# EAGLE board 6PortCentral (EAGLE 7.7.0)
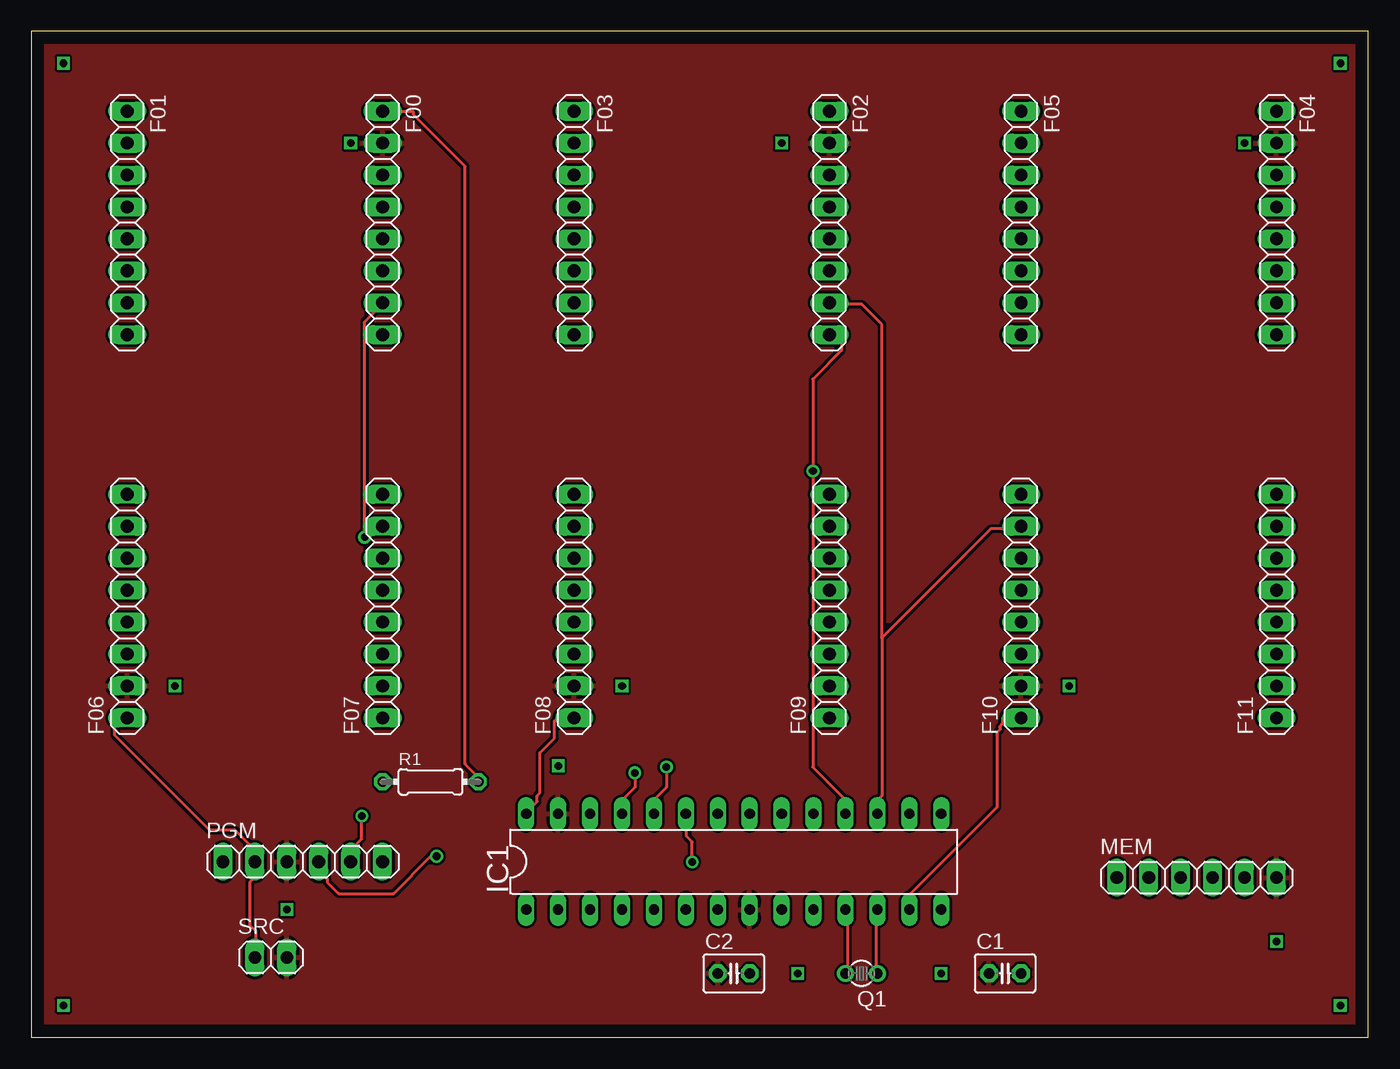
[diagram p0: board, top side]
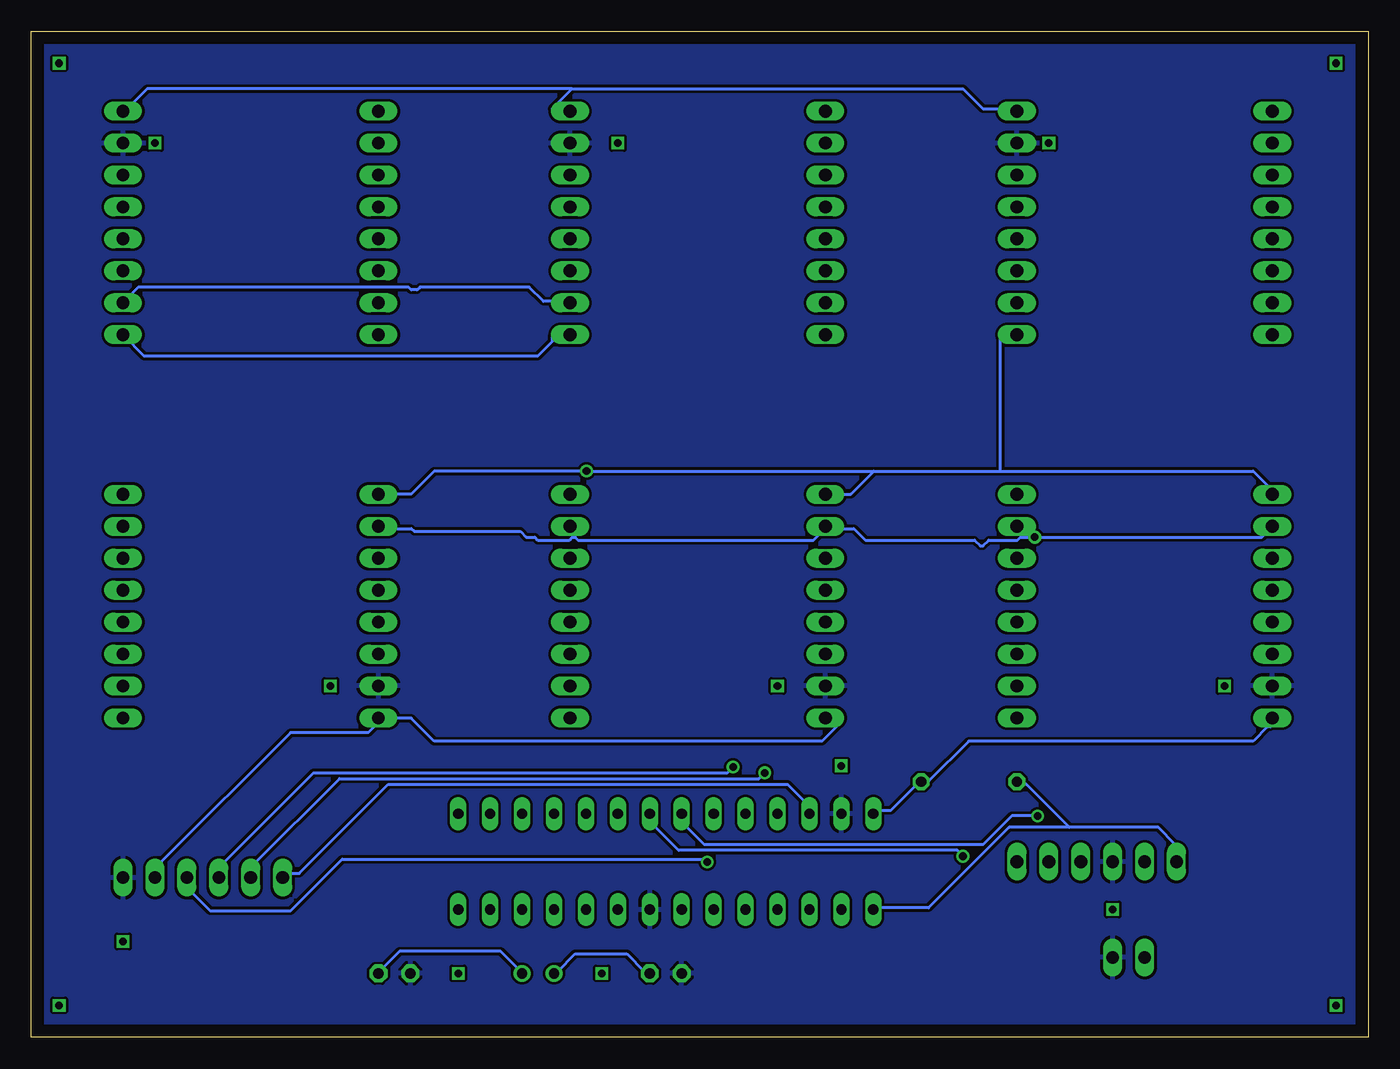
[diagram p1: board, bottom side, seen from below]

Size 106.35 x 80 mm. Coordinates in mm from the lower left corner, seen from the top.
Outline: 0,0 106.35,0 106.35,80 0,80 0,0
Copper layers (1*16): Top 0.035mm / dielectric 1.5mm / Bottom 0.035mm
Design rules "default": minimum track width 10mil, minimum drill 24mil, track to track 8mil, track to pad 8mil, pad to pad 8mil, via to via 8mil, smd to smd 8mil, copper to edge 40mil, drill to drill 8mil, minimum pad ring 10mil, minimum via ring 8mil, stop-mask expansion 4mil, vias tented up to drill 0mil, thermal gap 10mil

## Footprints (pad centres in the part's own frame; a part is rotated, then mirrored left to right if it is on the bottom)
C025-030X050 = drill 0.813 pad 1.422 octagon: 1 -1.27,0; 2 1.27,0
1X08 = drill 1.016 long: 1 -8.89,0; 2 -6.35,0; 3 -3.81,0; 4 -1.27,0; 5 1.27,0; 6 3.81,0; 7 6.35,0; 8 8.89,0
DIL28-3 = drill 0.813 long: 1 -16.51,-3.81; 2 -13.97,-3.81; 3 -11.43,-3.81; 4 -8.89,-3.81; 5 -6.35,-3.81; 6 -3.81,-3.81; 7 -1.27,-3.81; 8 1.27,-3.81; 9 3.81,-3.81; 10 6.35,-3.81; 11 8.89,-3.81; 12 11.43,-3.81; 13 13.97,-3.81; 14 16.51,-3.81; 15 16.51,3.81; 16 13.97,3.81; 17 11.43,3.81; 18 8.89,3.81; 19 6.35,3.81; 20 3.81,3.81; 21 1.27,3.81; 22 -1.27,3.81; 23 -3.81,3.81; 24 -6.35,3.81; 25 -8.89,3.81; 26 -11.43,3.81; 27 -13.97,3.81; 28 -16.51,3.81
1X06 = drill 1.016 long: 1 -6.35,0; 2 -3.81,0; 3 -1.27,0; 4 1.27,0; 5 3.81,0; 6 6.35,0
TC26V = drill 0.813: 1 -1.27,0; 2 1.27,0
0204/7 = drill 0.813 octagon: 1 -3.81,0; 2 3.81,0
1X02 = drill 1.016 long: 1 -1.27,0; 2 1.27,0

## Placement (x,y rotation side)
C1  [C025-030X050]  77.47,5.08 0 top
C2  [C025-030X050]  55.88,5.08 0 top
F00  [1X08]  27.94,64.77 270 top
F01  [1X08]  7.62,64.77 270 top
F02  [1X08]  63.5,64.77 270 top
F03  [1X08]  43.18,64.77 270 top
F04  [1X08]  99.06,64.77 270 top
F05  [1X08]  78.74,64.77 270 top
F06  [1X08]  7.62,34.29 90 top
F07  [1X08]  27.94,34.29 90 top
F08  [1X08]  43.18,34.29 90 top
F09  [1X08]  63.5,34.29 90 top
F10  [1X08]  78.74,34.29 90 top
F11  [1X08]  99.06,34.29 90 top
IC1  PIC24FJ64GA002  [DIL28-3]  55.88,13.97 0 top
MEM  [1X06]  92.71,12.7 0 top
PGM  [1X06]  21.59,13.97 0 top
Q1  [TC26V]  66.04,5.08 180 top
R1  10k  [0204/7]  31.75,20.32 0 top
SRC  [1X02]  19.05,6.35 0 top

## Library data of the parts
C1 C2 = adafruit
F00 F01-F09 F10 F11 MEM PGM SRC = pinhead
IC1 = microchip; MPN: PIC24FJ64GA002-I/SP; OC_FARNELL: 1332298; OC_NEWARK: 88K6132
Q1 = crystal; OC_FARNELL: unknown; OC_NEWARK: unknown
R1 = resistor

## Nets
GND: C1.1 C2.1 F00.2 F02.2 F04.2 F06.2 F08.2 F10.2 IC1.8 IC1.27 MEM.6 PGM.3 SRC.2
MISO: IC1.23 MEM.4
MOSI: IC1.24 MEM.3
N$1: IC1.1 PGM.1 R1.1
N$2: C1.2 IC1.12 Q1.1
N$3: C2.2 IC1.11 Q1.2
N$4: IC1.21 PGM.4
N$5: IC1.22 PGM.5
SCL: F00.7 F02.7 F04.7 F06.7 F08.7 F10.7 IC1.17
SDA: F00.8 F02.8 F04.8 F06.8 F08.8 F10.8 IC1.18
SPICK: IC1.25 MEM.2
SS: IC1.26 MEM.1
VDD: F00.1 F02.1 F04.1 F06.1 F08.1 F10.1 IC1.13 IC1.28 MEM.5 PGM.2 R1.2 SRC.1
VDDCORE: IC1.20

## Tracks (layer width: path | path; a pad name or v marks a point on that pad's centre or on a via)
GND
  pour Bottom: -1.27,81.28 107.95,81.28 107.95,-1.27 -1.27,-1.27
  pour Top: -1.27,81.28 107.95,81.28 107.95,-1.27 -1.27,-1.27
MISO  (via drill 0.61)
  Top 0.254: v52.58,13.95 52.58,15.54 52.12,16 52.12,17.6 IC1.23
  Bottom 0.254: v52.58,13.95 52.81,14.17 81.61,14.17 85.72,10.06 92.13,10.06 93.95,11.89 93.95,12.57 MEM.4
MOSI  (via drill 0.61)
  Top 0.254: v50.52,21.49 50.52,19.89 49.61,18.97 49.61,17.83 IC1.24
  Bottom 0.254: v50.52,21.49 50.98,21.03 83.9,21.03 91.44,13.49 MEM.3
N$1
  Bottom 0.254: 23.77,16.69 27.2,20.12 27.89,20.12 R1.1 | 23.77,16.69 16.69,16.69 15.32,15.32 15.32,14.17 PGM.1 | 23.77,16.69 28.57,16.69 34.98,10.29 39.32,10.29 IC1.1
N$2
  Top 0.254: Q1.1 67.21,5.26 67.21,10.06 IC1.12
  Bottom 0.254: C1.2 78.64,5.26 77.04,6.86 69.04,6.86 67.67,5.49 67.67,5.26 67.44,5.26 Q1.1
N$3
  Top 0.254: Q1.2 64.92,5.26 64.92,10.06 IC1.11
  Bottom 0.254: C2.2 57.15,5.26 57.61,5.26 58.98,6.63 63.09,6.63 64.47,5.26 64.69,5.26 Q1.2
N$4  (via drill 0.61)
  Top 0.254: v32.23,14.4 31.77,14.4 28.8,11.43 24.46,11.43 23.55,12.34 23.55,12.57 22.86,13.26 PGM.4
  Bottom 0.254: v32.23,14.4 32.69,14.86 54.86,14.86 56.69,16.69 56.69,17.14 57.15,17.6 IC1.21
N$5  (via drill 0.61)
  Top 0.254: v26.29,17.6 26.29,15.77 25.6,15.09 25.6,14.17 PGM.5
  Bottom 0.254: v26.29,17.6 28.35,17.6 30.63,15.32 52.81,15.32 54.18,16.69 54.41,16.69 54.41,17.6 IC1.22
N$6  (via drill 0.6)
  other vias: 2.54,77.47
N$7  (via drill 0.6)
  other vias: 104.14,77.47
N$8  (via drill 0.6)
  other vias: 104.14,2.54
N$9  (via drill 0.6)
  other vias: 2.54,2.54
N$10  (via drill 0.6)
  other vias: 20.32,10.16
N$11  (via drill 0.6)
  other vias: 11.43,27.94
N$12  (via drill 0.6)
  other vias: 46.99,27.94
N$13  (via drill 0.6)
  other vias: 82.55,27.94
N$14  (via drill 0.6)
  other vias: 99.06,7.62
N$15  (via drill 0.6)
  other vias: 72.39,5.08
N$16  (via drill 0.6)
  other vias: 60.96,5.08
N$17  (via drill 0.6)
  other vias: 41.91,21.59
N$18  (via drill 0.6)
  other vias: 25.4,71.12
N$19  (via drill 0.6)
  other vias: 59.69,71.12
N$20  (via drill 0.6)
  other vias: 96.52,71.12
SCL  (via drill 0.61)
  Top 0.254: v26.52,39.78 26.52,56.92 27.89,58.29 29.03,58.29 F00.7 | 67.67,31.77 67.67,19.2 67.44,18.97 67.44,17.83 IC1.17 | 67.67,31.77 76.35,40.46 77.27,40.46 F10.7 | 67.67,31.77 67.67,56.69 66.06,58.29 64.92,58.29 F02.7
  Bottom 0.254: F06.7 6.4,40.46 7.77,40.46 8.46,39.78 v26.52,39.78 27.66,39.78 27.89,39.55 30.18,39.55 30.63,39.09 30.86,39.09 31.32,39.55 40.01,39.55 40.92,40.46 41.83,40.46 F08.7 42.06,40.46 43.2,40.46 44.12,39.55 62.87,39.55 63.09,39.78 63.32,39.78 63.55,39.55 66.06,39.55 66.29,39.78 66.98,39.78 67.44,40.23 75.89,40.23 76.12,40.46 77.27,40.46 F10.7 | F04.7 100.13,58.52 98.98,58.52 97.84,59.66 76.35,59.66 76.12,59.44 75.67,59.44 75.44,59.66 66.75,59.66 65.61,58.52 64.92,58.52 F02.7
SDA  (via drill 0.61)
  Top 0.254: IC1.18 64.69,17.83 64.69,18.97 62.18,21.49 v62.18,45.03 62.18,52.35 64.47,54.63 64.47,55.55 64.69,55.78 F02.8
  Bottom 0.254: 39.32,45.03 29.26,45.03 | 29.26,45.03 9.14,45.03 7.54,43.43 6.63,43.43 6.4,43.2 F06.8 | 39.32,45.03 41.15,43.2 41.83,43.2 F08.8 | 29.26,45.03 29.26,55.78 F00.8 | F10.8 77.27,43.2 76.12,43.2 74.3,45.03 v62.18,45.03 39.32,45.03 | F04.8 100.13,55.78 98.98,55.78 97.38,54.18 66.06,54.18 64.92,55.32 64.92,55.78 F02.8
SPICK  (via drill 0.61)
  Top 0.254: v48.01,21.03 48.01,19.89 47.09,18.97 47.09,17.83 IC1.25
  Bottom 0.254: v48.01,21.03 48.46,20.57 81.84,20.57 88.7,13.72 88.7,12.8 MEM.2
SS
  Bottom 0.254: IC1.26 44.58,17.83 44.58,18.75 44.81,18.75 46.18,20.12 77.95,20.12 85.04,13.03 85.95,13.03 86.18,12.8 MEM.1
VDD
  Top 0.254: IC1.13 69.95,10.29 69.95,11.43 76.81,18.29 76.81,24.23 77.04,24.46 77.04,24.69 77.27,24.92 77.27,25.38 F10.1 | F08.1 41.83,25.38 41.6,25.15 41.6,23.77 40.46,22.63 40.46,19.43 40.23,19.2 40.23,18.75 39.55,18.06 39.55,17.83 IC1.28 | SRC.1 17.83,6.4 17.83,8.46 17.37,8.91 17.37,12.34 17.6,12.57 17.6,13.95 PGM.2 17.6,14.17 17.6,15.09 16.23,16.46 14.17,16.46 6.63,24 6.63,25.15 6.4,25.38 F06.1 | F00.1 29.26,73.61 30.4,73.61 30.4,73.38 34.52,69.27 34.52,21.72 35.43,20.8 35.43,20.34 R1.2
  Bottom 0.254: 63.32,75.44 32.23,75.44 30.63,73.84 29.26,73.84 F00.1 | 63.32,75.44 64.92,73.84 F02.1 | 63.32,75.44 97.16,75.44 98.53,74.07 98.75,74.07 98.98,73.84 100.13,73.84 F04.1 | MEM.5 96.47,12.8 96.01,13.26 96.01,13.95 85.72,24.23 79.55,24.23 78.41,25.38 77.5,25.38 F10.1 77.27,25.38 76.12,25.38 74.3,23.55 43.43,23.55 42.06,24.92 42.06,25.38 F08.1 | IC1.28 39.09,18.06 37.95,18.06 35.89,20.12 35.66,20.12 R1.2 35.43,20.34 34.98,20.34 31.77,23.55 9.14,23.55 8,24.69 7.77,24.69 7.09,25.38 6.4,25.38 F06.1